# EAGLE board board (EAGLE 9.6.2)
CNAME: JLink adapter board V1.6
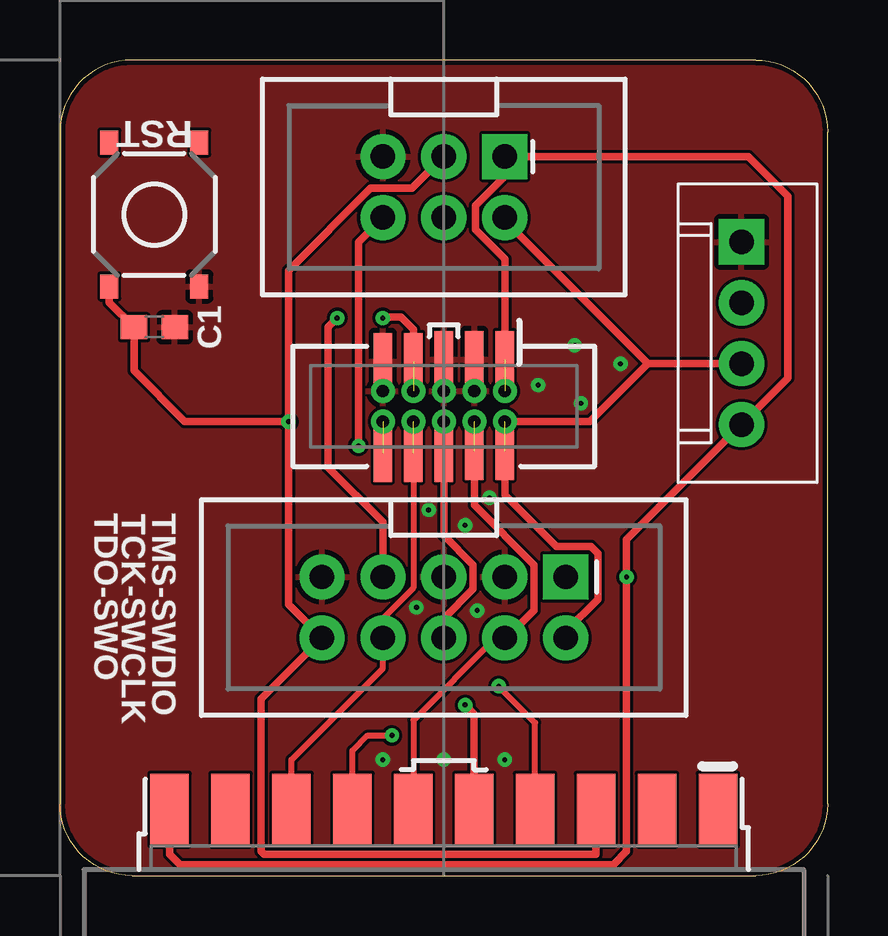
[diagram p0: board, top side]
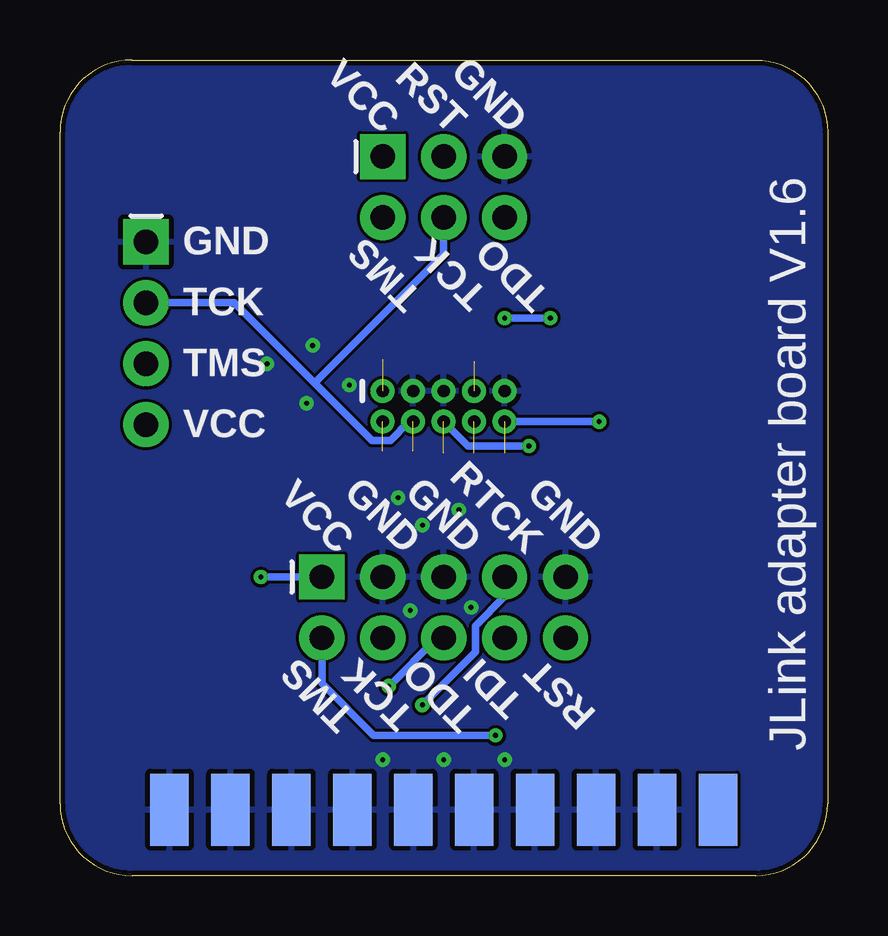
[diagram p1: board, bottom side, seen from below]

Size 32 x 34 mm. Coordinates in mm from the lower left corner, seen from the top.
Outline: 3,0 29,0 arc90 32,3 32,31 arc90 29,34 3,34 arc90 0,31 0,3 arc90 3,0
Copper layers (1*16): Top 0.035mm / dielectric 1.5mm / Bottom 0.035mm
Design rules "JLCPCB_2-Layer": minimum track width 5mil, minimum drill 0.2mm, track to track 5mil, track to pad 5mil, pad to pad 5mil, via to via 5mil, smd to smd 5mil, copper to edge 8mil, drill to drill 3mil, minimum pad ring 3mil, minimum via ring 0.2mm, stop-mask expansion 4mil, vias tented up to drill 15mil, thermal gap 8mil
Net classes: 0 default: width 0.254 mm

## Footprints (pad centres in the part's own frame; a part is rotated, then mirrored left to right if it is on the bottom)
C0603 = smd 1.1 x 1: 1 -0.85,0; 2 0.85,0
2X3-2.54MM-SHROUDED = drill 1.016 pad 1.88 square: 1 -1.27,2.54 | drill 1.016 pad 1.88: 2 1.27,2.54; 3 -1.27,0; 4 1.27,0; 5 -1.27,-2.54; 6 1.27,-2.54
2X5-2.54MM-SHROUDED = drill 1.016 pad 1.88 square: 1 -1.27,5.08 | drill 1.016 pad 1.88: 2 1.27,5.08; 3 -1.27,2.54; 4 1.27,2.54; 5 -1.27,0; 6 1.27,0; 7 -1.27,-2.54; 8 1.27,-2.54; 9 -1.27,-5.08; 10 1.27,-5.08
2X10-2.54MM-END-LAUNCH = smd 3 x 1.6: 1 0.5,11.43; 3 0.5,8.89; 5 0.5,6.35; 7 0.5,3.81; 9 0.5,1.27; 11 0.5,-1.27; 13 0.5,-3.81; 15 0.5,-6.35; 17 0.5,-8.89; 19 0.5,-11.43 | smd 3 x 1.6 bottom: 2 0.5,11.43; 4 0.5,8.89; 6 0.5,6.35; 8 0.5,3.81; 10 0.5,1.27; 12 0.5,-1.27; 14 0.5,-3.81; 16 0.5,-6.35; 18 0.5,-8.89; 20 0.5,-11.43
XH-4P-2.54MM = drill 1.016 pad 1.88 square: 1 -3.81,0 | drill 1.016 pad 1.88: 2 -1.27,0; 3 1.27,0; 4 3.81,0
2X5-1.27MM-SHROUDED_PTH+SMD = drill 0.508 pad 1: 1 -2.54,-0.635; 2 -2.54,0.635; 3 -1.27,-0.635; 4 -1.27,0.635; 5 0,-0.635; 6 0,0.635; 7 1.27,-0.635; 8 1.27,0.635; 9 2.54,-0.635; 10 2.54,0.635 | smd 0.76 x 2.4: 11 -2.54,-1.95; 12 -2.54,1.86; 13 -1.27,-1.95; 14 -1.27,1.86; 15 0,-1.95; 16 0,1.95; 17 1.27,-1.86; 18 1.27,1.95; 19 2.54,-1.86; 20 2.54,1.95
TACTILE_SWITCH_SMD_5.1MM = smd 1 x 0.75: 1 -3,1.875; 2 3,1.875; 3 -3,-1.875; 4 3,-1.875

## Placement (x,y rotation side)
C1  100nF  [C0603]  3.94,22.86 0 top
J1  PROG-HEADER_2X3_SHROUDED  [2X3-2.54MM-SHROUDED]  16,28.7 270 top
J3  PROG-HEADER_2X5_SHROUDED  [2X5-2.54MM-SHROUDED]  16,11.18 270 top
J4  PROG-HEADER_2X10_2.54MM-END-LAUNCH  [2X10-2.54MM-END-LAUNCH]  16,2.25 90 top
J8  CONN-1X4  [XH-4P-2.54MM]  28.41,22.61 270 top
J10  PROG-HEADER_2X5_1.27MM-SHROUDED_PTH_SMD  [2X5-1.27MM-SHROUDED_PTH+SMD]  16,19.56 180 top
S1  SWITCH-SPST-SMD-5.1MM  [TACTILE_SWITCH_SMD_5.1MM]  3.94,27.56 90 top

## Library data of the parts
C1 = angrypig7-RCL; SPICEPREFIX: C
J1 J4 J8 J10 = angrypig7-Connectors-Programming
J3 = angrypig7-Connectors-Programming; PROD_ID: CONN-08671; SF_ID: PRT-08506
S1 = angrypig7-Switches

## Nets
2: J4.2
GND: C1.2 J1.5 J3.3 J3.5 J3.9 J4.4 J4.6 J4.8 J4.10 J4.12 J4.14 J4.16 J4.18 J4.20 J8.1 J10.3 J10.5 J10.9 J10.13 J10.15 J10.19 S1.3
NTRST: J4.3
RST: C1.1 J1.3 J3.10 J4.15 J10.10 J10.20 S1.1
RTCK: J3.7 J4.11 J10.7 J10.17
TCK: J1.4 J3.4 J4.9 J8.2 J10.4 J10.14
TDI: J3.8 J4.5 J10.8 J10.18
TDO: J1.6 J3.6 J4.13 J10.6 J10.16
TMS: J1.2 J3.2 J4.7 J8.3 J10.2 J10.12
VCC: J1.1 J3.1 J4.1 J8.4 J10.1 J10.11

## Tracks (layer width: path | path; a pad name or v marks a point on that pad's centre or on a via)
GND  (via drill 0.2)
  other vias: 18.54,4.83 17.91,15.75 16.89,14.61 15.37,15.24 14.86,11.18 17.4,11.05 21.46,22.1 23.37,21.34 19.94,20.45 13.46,4.83 16,4.83 21.72,19.68
  pour Top: 0,34 0,0 32,0 32,34
  pour Bottom: 0,34 0,0 32,0 32,34
RST  (via drill 0.2)  (1 unrouted)
  Top 0.305: J4.15 22.35,0.89 8.51,0.89 8.38,1.02 8.38,7.37 J3.10 9.53,11.3 v9.53,18.92 | S1.1 2.06,23.89 C1.1 3.09,21.04 5.21,18.92 v9.53,18.92 | J1.3 14.68,28.65 12.96,28.65 9.53,25.22 v9.53,18.92
  Bottom 0.305: v9.53,18.92 J10.10
RTCK  (via drill 0.2)  (1 unrouted)
  Top 0.305: J3.7 13.46,14.73 11.18,17.02 11.18,22.86 v11.56,23.24 | J4.11 17.27,6.73 v16.89,7.11 | v13.46,23.24 13.5,23.28 14.21,23.28 14.73,22.76 J10.17
  Bottom 0.305: v16.89,7.11 14.68,9.32 14.68,10.41 13.46,11.63 J3.7 | v11.56,23.24 v13.46,23.24
TCK  (1 unrouted)
  Top 0.254: J4.9 14.73,6.47 18.16,9.91 J3.4
  Top 0.305: J10.14 17.27,15.44 19.76,12.95 19.76,11.05 18.61,9.91 J3.4
  Bottom 0.305: J10.4 17.44,18.92 18.22,18.14 19,18.14 21.38,20.53 | J8.2 24.73,23.88 21.38,20.53 | 21.38,20.53 16,25.91 J1.4
TDI  (1 unrouted)
  Top 0.254: J4.5 9.65,4.82 13.46,8.64 J3.8 13.46,10.72 14.73,11.99 J10.18
TDO  (via drill 0.2)  (1 unrouted)
  Top 0.254: J4.13 19.81,6.37 v18.29,7.89
  Top 0.305: J3.6 16,10.72 17.22,11.94 17.22,12.95 16,14.17 J10.16 | v12.45,17.91 12.45,26.42 J1.6
  Bottom 0.305: J3.6 16.27,9.91 v18.29,7.89 | J10.6 14.99,17.91 v12.45,17.91
TMS  (via drill 0.2)  (1 unrouted)
  Top 0.254: J4.7 12.19,5.21 12.83,5.84 v13.84,5.84
  Top 0.305: J3.2 21.08,10.17 22.43,11.52 22.43,13.43 22.14,13.72 20.7,13.72 18.54,15.88 J10.12 | 24.51,21.34 22.1,18.92 J10.2 | 24.51,21.34 J8.3 | 24.51,21.34 18.54,27.3 J1.2
  Bottom 0.305: v13.84,5.84 18.92,5.84 21.08,8 J3.2
VCC  (via drill 0.2)  (1 unrouted)
  Top 0.305: J4.1 4.57,0.89 5,0.46 23.06,0.46 23.62,1.02 v23.62,12.45 23.62,14 J8.4 30.35,20.73 30.35,28.32 28.7,29.97 J1.1 18.54,29.16 17.32,27.94 17.32,26.93 18.54,25.71 J10.11
  Bottom 0.305: v23.62,12.45 J3.1

## Text on the board
tPlace: RST | TDO-SWO | TCK-SWCLK | TMS-SWDIO
bPlace: GND | RST | VCC | TDO | TCK | TMS | GND | TCK | TMS | VCC | GND | RTCK | GND | GND | VCC | RST | TDI | TDO | TCK | TMS